# EAGLE board controller (EAGLE 9.6.2)
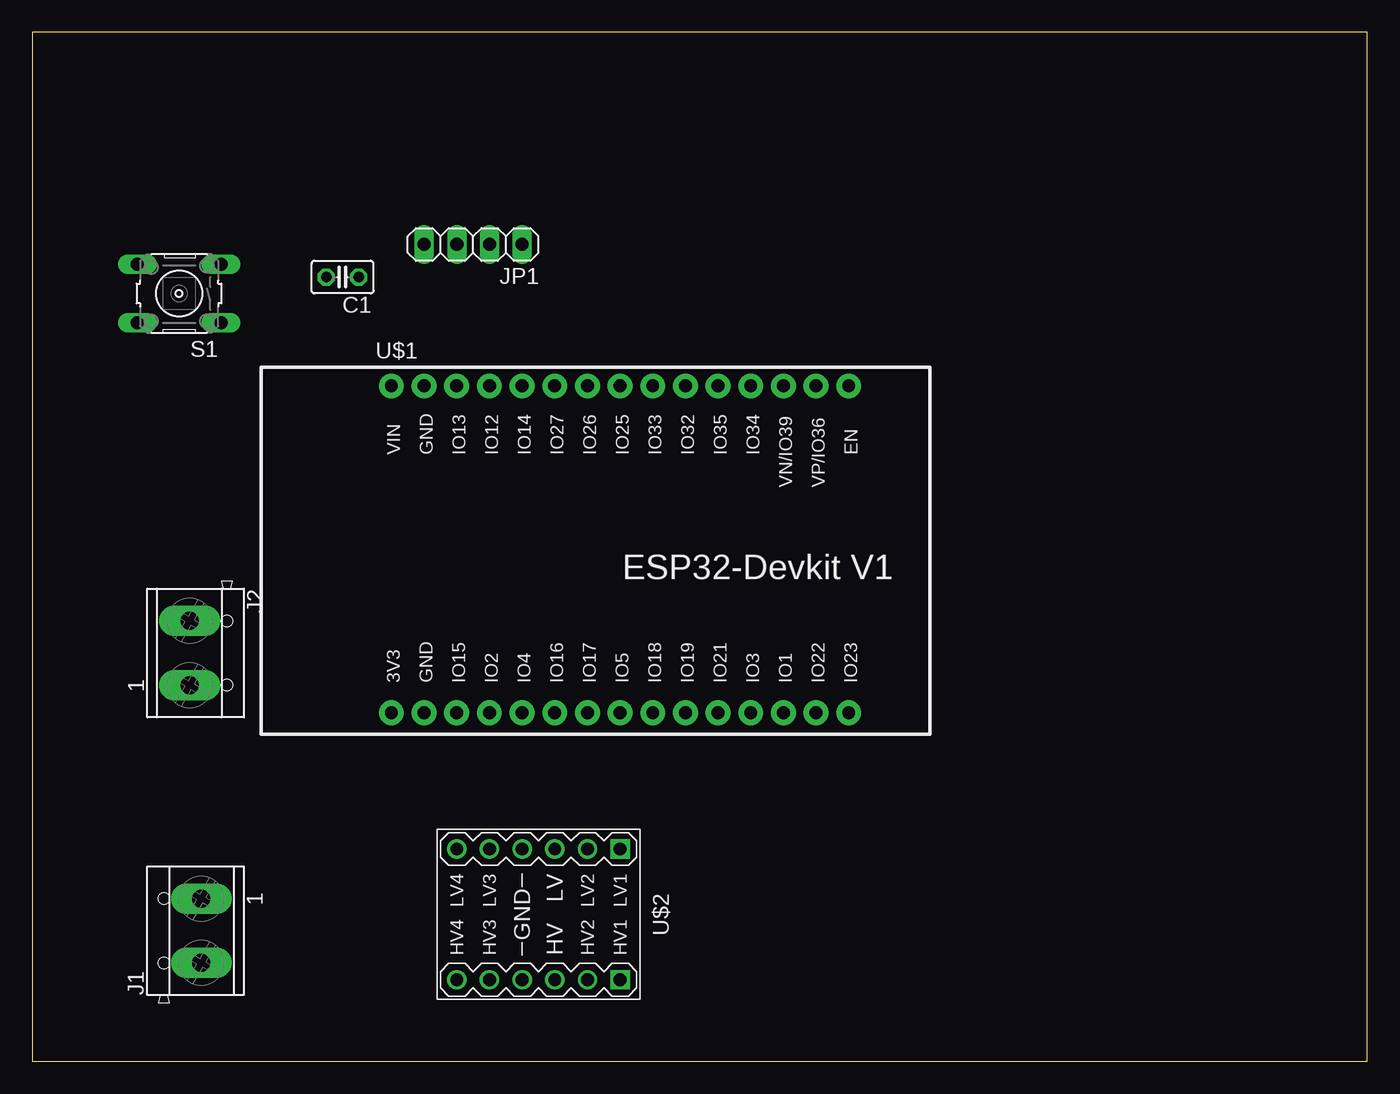
[diagram p0: board, top side]
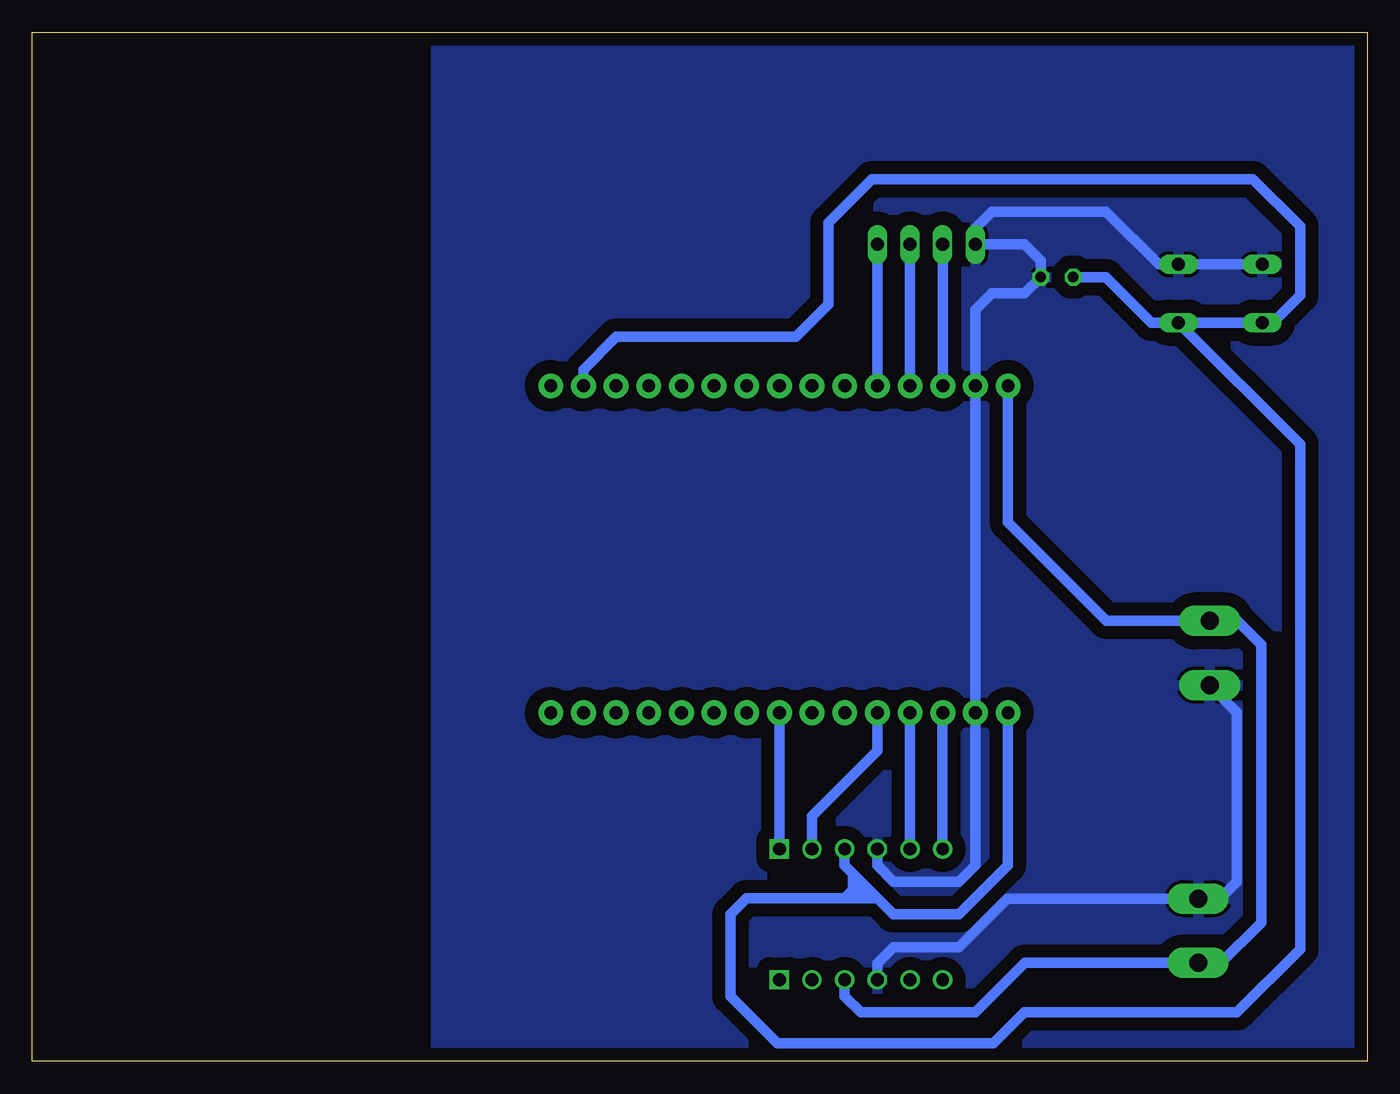
[diagram p1: board, bottom side, seen from below]

Size 103.81 x 80 mm. Coordinates in mm from the lower left corner, seen from the top.
Outline: 0,0 103.81,0 103.81,80 0,80 0,0
Copper layers (1*16): Top 0.035mm / dielectric 1.5mm / Bottom 0.035mm
Design rules "default": minimum track width 6mil, minimum drill 0.35mm, track to track 6mil, track to pad 6mil, pad to pad 6mil, via to via 6mil, smd to smd 6mil, copper to edge 40mil, drill to drill 6mil, minimum pad ring 10mil, minimum via ring 8mil, stop-mask expansion 4mil, vias tented up to drill 0mil, thermal gap 10mil

## Footprints (pad centres in the part's own frame; a part is rotated, then mirrored left to right if it is on the bottom)
C025-025X050 = drill 0.813 octagon: 1 -1.27,0; 2 1.27,0
TERMINAL_BLOCK_2P_5 = drill 1.4 pad 2.38 long: 1 2.5,-0.45; 2 -2.5,-0.45
1X04 = drill 1.016 long: 1 -3.81,0; 2 -1.27,0; 3 1.27,0; 4 3.81,0
B3F-10XX = drill 1.016 long: 1 -3.251,2.261; 2 3.251,2.261; 3 -3.251,-2.261; 4 3.251,-2.261
ESP32-DEVKITV1 = drill 1 pad 1.93: 3V3 -16.52,-12.27; D1 13.96,-12.27; D2 -8.9,-12.27; D3 11.42,-12.27; D4 -6.36,-12.27; D5 1.26,-12.27; D12 -8.9,13.135; D13 -11.44,13.135; D14 -6.36,13.135; D15 -11.44,-12.27; D16 -3.82,-12.27; D17 -1.28,-12.27; D18 3.8,-12.27; D19 6.34,-12.27; D21 8.88,-12.27; D22 16.5,-12.27; D23 19.04,-12.27; D25 1.26,13.135; D26 -1.28,13.135; D27 -3.82,13.135; D32 6.34,13.135; D33 3.8,13.135; D34 11.42,13.135; D35 8.88,13.135; D36 16.5,13.135; D39 13.96,13.135; EN 19.04,13.135; GND@1 -13.98,13.135; GND@2 -13.98,-12.27; VIN -16.52,13.135
LEVEL-SHIFTER-4CH = drill 1 square: J1.1 -5.08,6.35; J2.1 5.08,6.35 | drill 1: J1.2 -5.08,3.81; J1.3 -5.08,1.27; J1.4 -5.08,-1.27; J1.5 -5.08,-3.81; J1.6 -5.08,-6.35; J2.2 5.08,3.81; J2.3 5.08,1.27; J2.4 5.08,-1.27; J2.5 5.08,-3.81; J2.6 5.08,-6.35

## Placement (x,y rotation side)
C1  [C025-025X050]  24.13,60.96 180 top
J1  CON_TERMINAL_BLOCK_02-5MM  [TERMINAL_BLOCK_2P_5]  12.7,10.16 90 top
J2  CON_TERMINAL_BLOCK_02-5MM  [TERMINAL_BLOCK_2P_5]  12.7,31.75 270 top
JP1  [1X04]  34.29,63.5 180 top
S1  [B3F-10XX]  11.43,59.69 180 top
U$1  ESP32DEVKITV1  [ESP32-DEVKITV1]  44.45,39.37 0 top
U$2  LEVEL-SHIFTER-4CH  [LEVEL-SHIFTER-4CH]  39.37,11.43 270 top

## Library data of the parts
C1 = rcl; SPICEPREFIX: C
J1 J2 = tblok
JP1 = pinhead
S1 = switch-omron; MPN: B3F-1000; OC_FARNELL: 176432; OC_NEWARK: 36M3542
U$1 = esp32-devkitv1
U$2 = diy-model

## Nets
GND: C1.1 J1.1 J2.1 JP1.4 S1.3 S1.4 U$1.GND@1 U$1.GND@2 U$2.J1.4 U$2.J2.4
HV: J1.2 J2.2 U$1.VIN U$2.J2.3
LV: C1.2 S1.1 S1.2 U$1.3V3 U$1.D36 U$2.J1.3
LV1: U$1.D5 U$2.J1.1
LV2: U$1.D4 U$2.J1.2
LV3: U$1.D2 U$2.J1.5
LV4: U$1.D15 U$2.J1.6
OUT1: JP1.1 U$1.D14
OUT2: JP1.2 U$1.D12
OUT3: JP1.3 U$1.D13

## Tracks (layer width: path | path; a pad name or v marks a point on that pad's centre or on a via)
GND
  Bottom 0.813: S1.4 S1.3 16.23,61.95 20.32,66.04 29.21,66.04 30.48,64.77 JP1.4 26.67,63.5 25.4,62.23 C1.1 26.67,59.69 29.21,59.69 30.47,58.43 U$1.GND@1 U$1.GND@2 | U$2.J1.4 38.1,15.24 36.83,13.97 31.75,13.97 30.47,15.25 U$1.GND@2 | U$1.GND@2 | J2.1 10.16,27.16 10.16,13.97 11.47,12.66 J1.1 27.98,12.66 31.75,8.89 36.83,8.89 38.1,7.62 U$2.J2.4
  pour Bottom (isolate 1.016): 0,80.01 0,-5.08 3.81,-5.08 72.39,-5.08 72.39,80.01
HV
  Bottom 0.813: U$2.J2.3 40.64,5.08 39.37,3.81 30.48,3.81 26.63,7.66 J1.2 13.11,7.62 11.43,7.62 8.26,10.79 8.26,32.38 10.12,34.25 J2.2 20.28,34.25 27.94,41.91 U$1.VIN
LV
  Bottom 0.813: S1.1 16.79,57.43 20.32,60.96 C1.2 | S1.1 S1.2 7.9,57.15 7.62,57.15 5.23,59.54 5.23,64.92 8.89,68.58 38.53,68.58 41.9,65.2 41.9,58.85 44.44,56.31 58.41,56.31 60.95,53.77 U$1.D36 | U$2.J1.3 40.64,15.24 40.01,14.61 | U$1.3V3 27.94,15.24 31.75,11.43 36.83,11.43 38.1,12.7 | 40.01,14.61 39.37,13.97 | 39.37,13.97 38.73,13.34 | 38.73,13.34 38.1,12.7 | S1.1 5.23,47.98 5.23,8.74 10.16,3.81 26.67,3.81 29.06,1.42 45.87,1.42 49.53,5.08 49.53,11.43 48.26,12.7 40.64,12.7 | 40.64,12.7 38.1,12.7 | 40.01,13.34 40.64,12.7 | 38.73,13.34 40.01,13.34 | 39.37,13.97 40.01,13.34 | 40.01,14.61 40.01,13.34
LV1
  Bottom 0.813: U$1.D5 U$2.J1.1
LV2
  Bottom 0.813: U$2.J1.2 43.18,19.05 38.09,24.14 U$1.D4
LV3
  Bottom 0.813: U$2.J1.5 U$1.D2
LV4
  Bottom 0.813: U$1.D15 U$2.J1.6
OUT1
  Bottom 0.813: JP1.1 38.1,52.52 U$1.D14
OUT2
  Bottom 0.813: JP1.2 35.56,52.52 U$1.D12
OUT3
  Bottom 0.813: U$1.D13 JP1.3